# EAGLE board PCB (EAGLE 9.7.0)
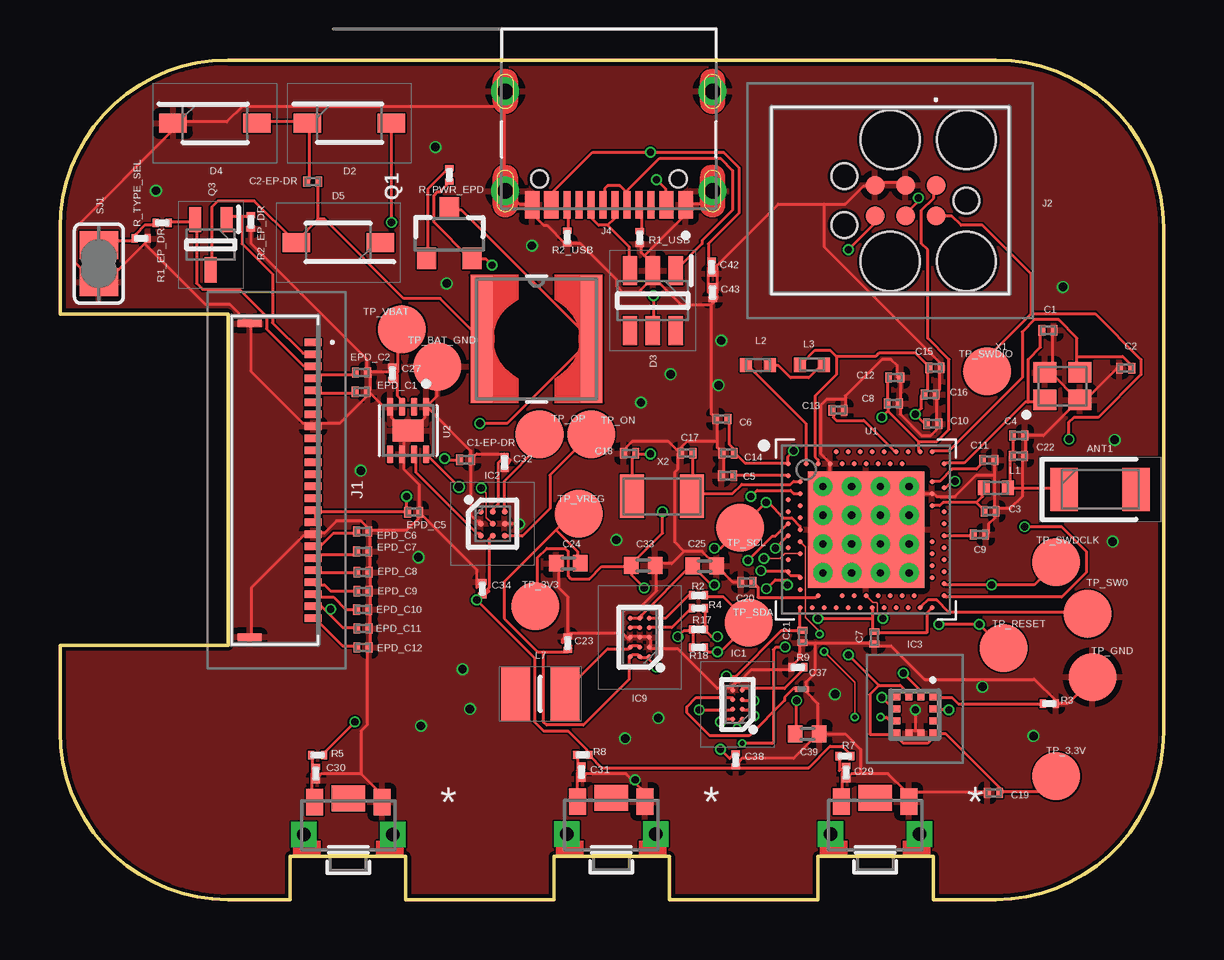
[diagram p0: board, top side]
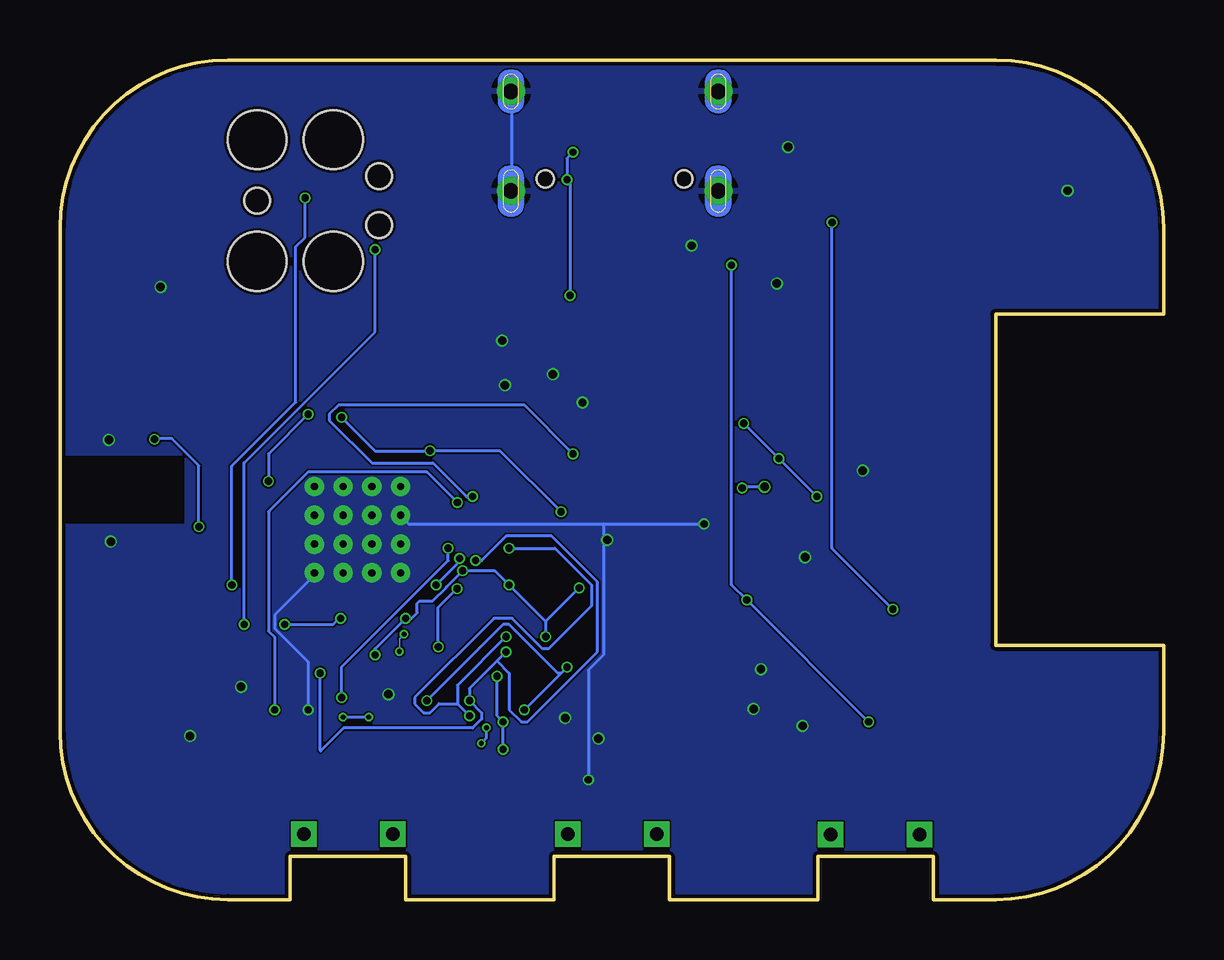
[diagram p1: board, bottom side, seen from below]

Size 46 x 35 mm. Coordinates in mm from the lower left corner, seen from the top.
Outline: 39,0 36.4,0 36.4,1.8 31.6,1.8 31.6,0 25.4,0 25.4,1.8 20.6,1.8 20.6,0 14.4,0 14.4,1.8 9.6,1.8 9.6,0 7,0 arc-90 0,7 0,10.6 7,10.6 7,24.4 0,24.4 0,28 arc-90 7,35 39,35 arc-90 46,28 46,7 arc-90 39,0
Copper layers (1*16): Top 0.035mm / dielectric 1.6mm / Bottom 0.035mm
Design rules "jlcpcb-2layers.dru": minimum track width 0.07mm, minimum drill 0.2mm, track to track 0.07mm, track to pad 0.07mm, pad to pad 0.07mm, via to via 0.07mm, smd to smd 0.07mm, copper to edge 0.15mm, drill to drill 0.1mm, minimum pad ring 10mil, minimum via ring 3mil, stop-mask expansion 4mil, vias tented up to drill 0mil, thermal gap 10mil
tRestrict: area 40.8,15.7 to 45.9,18.5
bRestrict: area 40.8,15.7 to 45.9,18.5

## Footprints (pad centres in the part's own frame; a part is rotated, then mirrored left to right if it is on the bottom)
2450AT18B100E_ANTC3216X140N = smd 1.15 x 1.8: 1 -1.5,0; 2 1.5,0
NORDIC_NRF_3_RESC0201_L = smd 0.28 x 0.43: 1 -0.255,0; 2 0.255,0
GRM011R60J152KE01L_1_0201 = smd 0.35 x 0.25: 1 0,0.275; 2 0,-0.275
PERFECT_0402_0402 = smd 0.6 x 0.7: 1 -0.5,0; 2 0.5,0
GRM011R60J152KE01L_2_CAPC0201X13N = smd 0.22 x 0.23: 1 -0.185,0; 2 0.185,0
ESP32_C6_LIBRARY_5_SOD3716X135N = smd 1.15 x 0.8: 1 -1.75,0; 2 1.75,0
ESP32_C6_LIBRARY_3_SOT95P280X145-6N = smd 1.2 x 0.6: 1 -1.25,0.95; 2 -1.25,0; 3 -1.25,-0.95; 4 1.25,-0.95; 5 1.25,0; 6 1.25,0.95
BQ25180YBGR_BGA8C40P2X4_100X155X50 = smd 0.2 x 0.2: A1 -0.2,0.6; A2 0.2,0.6; B1 -0.2,0.2; B2 0.2,0.2; C1 -0.2,-0.2; C2 0.2,-0.2; D1 -0.2,-0.6; D2 0.2,-0.6
DRV2605YZFR_BGA9C50P3X3_144X144X62 = smd 0.25 x 0.25: A1 -0.5,0.5; A2 0,0.5; A3 0.5,0.5; B1 -0.5,0; B2 0,0; B3 0.5,0; C1 -0.5,-0.5; C2 0,-0.5; C3 0.5,-0.5
BMA423_BMA423 = smd 0.3 x 0.35: 1 -0.75,-0.775; 2 -0.25,-0.775; 3 0.25,-0.775; 4 0.75,-0.775; 7 0.75,0.775; 8 0.25,0.775; 9 -0.25,0.775; 10 -0.75,0.775 | smd 0.35 x 0.3: 5 0.775,-0.25; 6 0.775,0.25; 11 -0.775,0.25; 12 -0.775,-0.25
RT6160AWSC_BGA15C40P3X5_140X230X60 = smd 0.216 x 0.216: A1 -0.4,0.8; A2 0,0.8; A3 0.4,0.8; B1 -0.4,0.4; B2 0,0.4; B3 0.4,0.4; C1 -0.4,0; C2 0,0; C3 0.4,0; D1 -0.4,-0.4; D2 0,-0.4; D3 0.4,-0.4; E1 -0.4,-0.8; E2 0,-0.8; E3 0.4,-0.8
503480-2400_5034802400 = smd 0.3 x 0.7: 1 -5.75,1.525; 2 -5.25,1.525; 3 -4.75,1.525; 4 -4.25,1.525; 5 -3.75,1.525; 6 -3.25,1.525; 7 -2.75,1.525; 8 -2.25,1.525; 9 -1.75,1.525; 10 -1.25,1.525; 11 -0.75,1.525; 12 -0.25,1.525; 13 0.25,1.525; 14 0.75,1.525; 15 1.25,1.525; 16 1.75,1.525; 17 2.25,1.525; 18 2.75,1.525; 19 3.25,1.525; 20 3.75,1.525; 21 4.25,1.525; 22 4.75,1.525; 23 5.25,1.525; 24 5.75,1.525 | smd 0.3 x 1: MP1 -6.54,-1.125; MP2 6.54,-1.125
TC2030-IDC_TC2030IDC = smd 0.783 x 0.783: 1 -0.953,-0.635; 2 -0.953,0.635; 3 0.317,-0.635; 4 0.317,0.635; 5 1.588,-0.635; 6 1.588,0.635 | hole 2.451: -2.223,-2.54; -2.223,2.54; 0.952,-2.54; 0.952,2.54 | hole 1.067: -2.223,0; 2.857,-1.016; 2.857,1.016
KH-TYPE-C-16P_KINGHELM_KH-TYPE-C-16P = smd 0.6 x 1.15: A1_B12 -3.2,4.725; A4_B9 -2.4,4.725; A9_B4 2.4,4.725; A12_B1 3.2,4.725 | smd 0.3 x 1.15: A5 -1.25,4.725; A6 -0.25,4.725; A7 0.25,4.725; A8 1.25,4.725; B5 1.75,4.725; B6 0.75,4.725; B7 -0.75,4.725; B8 -1.75,4.725 | drill 0.65 pad 1.05: SH1 -4.32,0; SH2 4.32,0; SH3 -4.32,4.15; SH4 4.32,4.15 | hole 0.7: -2.89,3.65; 2.89,3.65
NORDIC_NRF_2_RESC0402_L = smd 0.5 x 0.6: 1 -0.5,0; 2 0.5,0
ESP32_C6_LIBRARY_2_IND_4828-WE-TPC_WRE = smd 0.9 x 5.3: 1 -2.286,0; 2 2.286,0
MLP2016SR47MT0S1_INDC2016X100N = smd 1.2 x 2.2: 1 -1.028,0; 2 1.028,0
ESP32_C6_LIBRARY_4_ESP32_C6_LIBRARY_4_ESP32_C6_LIBRARY_4_ESP32_C6_LIBRARY_4_ESP32_WROVER_SPARKFUN-DISCRETESEMI_SOT23-3 = smd 0.8 x 0.9: 1 -0.95,-1; 2 0.95,-1; 3 0,1.1
ESP32_C6_LIBRARY_6_SOT65P210X110-3N = smd 1.05 x 0.5: 1 -1.05,0.65; 2 -1.05,-0.65; 3 1.05,0
CPF0201D7K68C1_0201 = smd 0.35 x 0.25: 1 0,0.275; 2 0,-0.275
ERA-1AEB3401C_0201 = smd 0.35 x 0.25: 1 0,0.275; 2 0,-0.275
ESP32_C6_LIBRARY_7_JUMPER_SJ = smd 1.168 x 1.6: 1 -0.762,0; 2 0.762,0
2025-10-22_07-23-44_LIBRARY_SW_EVP-AKE31A_PAN = smd 0.711 x 1.092: 1 -1.4,-0.972; 2 1.4,-0.972 | drill 0.559 pad 0.914 square: 3 -1.848,0.381; 4 1.848,0.381 | smd 1.397 x 1.092: 5 0,-1.124
HECTOR_WATCH_1_TP20R = smd 2 x 2: TP 0,0
NORDIC_NRF_4_AQFN50P700X700X85_HS-74N = smd 4.85 x 4.85: P$74 0,0 | drill 0.3 pad 0.6: P$75 -1.8,1.8; P$76 -0.6,1.8; P$77 0.6,1.8; P$78 1.8,1.8; P$79 -1.8,0.6; P$80 -0.6,0.6; P$81 0.6,0.6; P$82 1.8,0.6; P$83 -1.8,-0.6; P$84 -0.6,-0.6; P$85 0.6,-0.6; P$86 1.8,-0.6; P$87 -1.8,-1.8; P$88 -0.6,-1.8; P$89 0.6,-1.8; P$90 1.8,-1.8 | smd 0.2 x 0.2: P$A8 -1.25,3.25; P$A10 -0.75,3.25; P$A12 -0.25,3.25; P$A14 0.25,3.25; P$A16 0.75,3.25; P$A18 1.25,3.25; P$A20 1.75,3.25; P$A22 2.25,3.25; P$A23 2.75,3.25; P$AA24 3.25,-2.25; P$AB2 -2.75,-2.5; P$AC5 -2,-2.75; P$AC9 -1,-2.75; P$AC11 -0.5,-2.75; P$AC13 0,-2.75; P$AC15 0.5,-2.75; P$AC17 1,-2.75; P$AC19 1.5,-2.75; P$AC21 2,-2.75; P$AC24 3.25,-2.75; P$AD2 -2.75,-3.25; P$AD4 -2.25,-3.25; P$AD6 -1.75,-3.25; P$AD8 -1.25,-3.25; P$AD10 -0.75,-3.25; P$AD12 -0.25,-3.25; P$AD14 0.25,-3.25; P$AD16 0.75,-3.25; P$AD18 1.25,-3.25; P$AD20 1.75,-3.25; P$AD22 2.25,-3.25; P$AD23 2.75,-3.25; P$B1 -3.25,2.75; P$B3 -2.5,2.75; P$B5 -2,2.75; P$B7 -1.5,2.75; P$B9 -1,2.75; P$B11 -0.5,2.75; P$B13 0,2.75; P$B15 0.5,2.75; P$B17 1,2.75; P$B19 1.5,2.75; P$B24 3.25,2.75; P$C1 -3.25,2.25; P$D2 -2.75,2; P$D23 2.75,2; P$E24 3.25,1.75; P$F2 -2.75,1.5; P$F23 2.75,1.5; P$G1 -3.25,1.25; P$H2 -2.75,1; P$H23 2.75,1; P$J1 -3.25,0.75; P$J24 3.25,0.75; P$K2 -2.75,0.5; P$L1 -3.25,0.25; P$L24 3.25,0.25; P$M2 -2.75,0; P$N1 -3.25,-0.25; P$N24 3.25,-0.25; P$P2 -2.75,-0.5; P$P23 2.75,-0.5; P$R1 -3.25,-0.75; P$R24 3.25,-0.75; P$T2 -2.75,-1; P$T23 2.75,-1; P$U1 -3.25,-1.25; P$U24 3.25,-1.25; P$V23 2.75,-1.5; P$W1 -3.25,-1.75; P$W24 3.25,-1.75; P$Y2 -2.75,-2; P$Y23 2.75,-2
ESP32_C6_LIBRARY_SON50P200X200X80-9N = smd 0.76 x 0.27: 1 -0.985,0.75; 2 -0.985,0.25; 3 -0.985,-0.25; 4 -0.985,-0.75; 5 0.985,-0.75; 6 0.985,-0.25; 7 0.985,0.25; 8 0.985,0.75 | smd 0.9 x 1.3: 9 0,0
NORDIC_NRF_BT-XTAL_2016_N = smd 0.95 x 0.85: 1 -0.725,-0.575; 2 0.725,-0.575; 3 0.725,0.575; 4 -0.725,0.575
NORDIC_NRF_1_XTAL_3215_N = smd 1 x 1.8: 1 -1.25,0; 2 1.25,0

## Placement (x,y rotation side)
ANT1  2450AT18B100E  [2450AT18B100E_ANTC3216X140N]  43.36,17.1 0 top
C1  12pF  [NORDIC_NRF_3_RESC0201_L]  41.18,23.73 0 top
C1-EP-DR  10uF  [NORDIC_NRF_3_RESC0201_L]  16.91,18.33 0 top
C2  12pF  [NORDIC_NRF_3_RESC0201_L]  44.42,22.15 0 top
C2-EP-DR  4.7uF/25V  [NORDIC_NRF_3_RESC0201_L]  10.54,29.93 0 top
C3  1pF  [NORDIC_NRF_3_RESC0201_L]  38.77,16.19 0 top
C4  1pF  [NORDIC_NRF_3_RESC0201_L]  39.96,19.34 0 top
C5  100nF  [NORDIC_NRF_3_RESC0201_L]  27.83,17.67 180 top
C6  4.7µF  [NORDIC_NRF_3_RESC0201_L]  27.59,20.03 180 top
C7  100nF  [NORDIC_NRF_3_RESC0201_L]  33.95,10.91 270 top
C8  100nF  [NORDIC_NRF_3_RESC0201_L]  34.73,20.68 0 top
C9  820pF N.C.  [NORDIC_NRF_3_RESC0201_L]  38.33,15.22 0 top
C10  N.C.  [NORDIC_NRF_3_RESC0201_L]  36.38,19.83 0 top
C11  100pF  [NORDIC_NRF_3_RESC0201_L]  38.71,18.32 0 top
C12  100nF  [NORDIC_NRF_3_RESC0201_L]  34.8,21.76 0 top
C13  N.C.  [NORDIC_NRF_3_RESC0201_L]  32.43,20.4 0 top
C14  4.7µF  [NORDIC_NRF_3_RESC0201_L]  27.85,18.61 180 top
C15  1.0µF  [NORDIC_NRF_3_RESC0201_L]  36.47,22.17 0 top
C16  47nF  [NORDIC_NRF_3_RESC0201_L]  36.27,21.05 0 top
C17  12pF  [NORDIC_NRF_3_RESC0201_L]  26.13,18.61 0 top
C18  12pF  [NORDIC_NRF_3_RESC0201_L]  23.74,18.6 0 top
C19  100nF  [NORDIC_NRF_3_RESC0201_L]  38.91,4.45 180 top
C20  4.7µF  [NORDIC_NRF_3_RESC0201_L]  28.63,13.23 180 top
C21  4.7µF  [NORDIC_NRF_3_RESC0201_L]  30.95,10.96 270 top
C22  N.C.  [NORDIC_NRF_3_RESC0201_L]  39.95,18.49 0 top
C23  0.1uF  [GRM011R60J152KE01L_1_0201]  21.16,10.69 0 top
C24  10uF  [PERFECT_0402_0402]  21.18,14.02 0 top
C25  22uF  [PERFECT_0402_0402]  26.87,13.9 0 top
C27  0.1uF  [GRM011R60J152KE01L_1_0201]  13.86,21.94 0 top
C29  1uF  [GRM011R60J152KE01L_1_0201]  32.77,5.29 180 top
C30  1uF  [GRM011R60J152KE01L_1_0201]  10.67,5.25 180 top
C31  1uF  [GRM011R60J152KE01L_1_0201]  21.74,5.31 180 top
C32  1uF  [GRM011R60J152KE01L_1_0201]  18.53,18.22 180 top
C33  22uF  [PERFECT_0402_0402]  24.31,13.93 0 top
C34  0.1uF  [GRM011R60J152KE01L_1_0201]  17.61,12.96 0 top
C37  1uF  [GRM011R60J152KE01L_2_CAPC0201X13N]  30.92,8.78 180 top
C38  1uF  [GRM011R60J152KE01L_1_0201]  28.17,5.82 180 top
C39  10uF  [PERFECT_0402_0402]  31.15,6.91 0 top
C42  0.1uF  [GRM011R60J152KE01L_1_0201]  27.16,26.36 0 top
C43  4.7uF  [GRM011R60J152KE01L_1_0201]  27.2,25.3 0 top
D2  MBR0530  [ESP32_C6_LIBRARY_5_SOD3716X135N]  12.07,32.37 0 top
D3  USBLC6-2SC6Y  [ESP32_C6_LIBRARY_3_SOT95P280X145-6N]  24.71,24.97 270 top
D4  MBR0530  [ESP32_C6_LIBRARY_5_SOD3716X135N]  6.46,32.36 0 top
D5  MBR0530  [ESP32_C6_LIBRARY_5_SOD3716X135N]  11.6,27.39 180 top
EPD_C1  1uF/50V  [NORDIC_NRF_3_RESC0201_L]  12.56,21.16 180 top
EPD_C2  1uF/50V  [NORDIC_NRF_3_RESC0201_L]  12.57,21.97 180 top
EPD_C5  0.1uF/50V  [NORDIC_NRF_3_RESC0201_L]  14.74,16.15 180 top
EPD_C6  1uF/50V  [NORDIC_NRF_3_RESC0201_L]  12.62,15.34 180 top
EPD_C7  1uF/50V  [NORDIC_NRF_3_RESC0201_L]  12.62,14.51 180 top
EPD_C8  1uF/50V  [NORDIC_NRF_3_RESC0201_L]  12.63,13.64 180 top
EPD_C9  1uF/50V  [NORDIC_NRF_3_RESC0201_L]  12.63,12.85 180 top
EPD_C10  1uF/50V  [NORDIC_NRF_3_RESC0201_L]  12.62,12.09 180 top
EPD_C11  1uF/50V  [NORDIC_NRF_3_RESC0201_L]  12.63,11.3 180 top
EPD_C12  1uF/50V  [NORDIC_NRF_3_RESC0201_L]  12.63,10.51 180 top
IC1  BQ25180YBGR  [BQ25180YBGR_BGA8C40P2X4_100X155X50]  28.24,8.13 180 top
IC2  DRV2605YZFR  [DRV2605YZFR_BGA9C50P3X3_144X144X62]  18.03,15.67 0 top
IC3  BMA421  [BMA423_BMA423]  35.63,7.7 180 top
IC9  RT6160AWSC  [RT6160AWSC_BGA15C40P3X5_140X230X60]  24.17,10.93 180 top
J1  503480-2400  [503480-2400_5034802400]  9.03,17.48 270 top
J2  TC2030-IDC  [TC2030-IDC_TC2030IDC]  35.56,29.14 180 top
J4  KH-TYPE-C-16P  [KH-TYPE-C-16P_KINGHELM_KH-TYPE-C-16P]  22.88,33.69 180 top
L1  3.9nH  [NORDIC_NRF_2_RESC0402_L]  39.02,17.16 0 top
L2  10µH  [NORDIC_NRF_2_RESC0402_L]  29.1,22.28 0 top
L3  15nH  [NORDIC_NRF_2_RESC0402_L]  31.34,22.3 180 top
L5  68uH  [ESP32_C6_LIBRARY_2_IND_4828-WE-TPC_WRE]  19.86,23.37 0 top
L7  FTC252012SR47MBCA  [MLP2016SR47MT0S1_INDC2016X100N]  20.02,8.57 180 top
Q1  20V/4.2A/52mΩ/1.4W  [ESP32_C6_LIBRARY_4_ESP32_C6_LIBRARY_4_ESP32_C6_LIBRARY_4_ESP32_C6_LIBRARY_4_ESP32_WROVER_SPARKFUN-DISCRETESEMI_SOT23-3]  16.23,27.73 0 top
Q3  SI1308EDL-T1-GE3  [ESP32_C6_LIBRARY_6_SOT65P210X110-3N]  6.29,27.3 270 top
R1_EP_DR  0.47  [CPF0201D7K68C1_0201]  4.26,28.21 90 top
R1_USB  5K1  [ERA-1AEB3401C_0201]  24.17,27.6 180 top
R2  0  [CPF0201D7K68C1_0201]  26.62,12.68 90 top
R2_EP_DR  10K  [CPF0201D7K68C1_0201]  7.96,28.25 180 top
R2_USB  5K1  [ERA-1AEB3401C_0201]  21.15,27.62 0 top
R3  0  [CPF0201D7K68C1_0201]  41.24,8.16 90 top
R4  0  [CPF0201D7K68C1_0201]  26.61,12.15 90 top
R5  10K  [ERA-1AEB3401C_0201]  10.74,6.02 90 top
R7  10K  [ERA-1AEB3401C_0201]  32.72,5.98 90 top
R8  10K  [ERA-1AEB3401C_0201]  21.79,6.03 90 top
R9  10K  [CPF0201D7K68C1_0201]  30.76,9.68 90 top
R17  3K3  [CPF0201D7K68C1_0201]  26.62,11.26 90 top
R18  3K3  [CPF0201D7K68C1_0201]  26.62,10.51 90 top
R_PWR_EPD  10K  [CPF0201D7K68C1_0201]  16.23,30.21 0 top
R_TYPE_SEL  2.2  [CPF0201D7K68C1_0201]  3.38,27.56 270 top
SJ1  [ESP32_C6_LIBRARY_7_JUMPER_SJ]  1.62,26.51 90 top
SW_DN  2025-10-22_07-23-44_LIBRARY_EVP-AKE31ASW_EVP-AKE31A_PAN  [2025-10-22_07-23-44_LIBRARY_SW_EVP-AKE31A_PAN]  33.98,3.11 180 top
SW_ENT  2025-10-22_07-23-44_LIBRARY_EVP-AKE31ASW_EVP-AKE31A_PAN  [2025-10-22_07-23-44_LIBRARY_SW_EVP-AKE31A_PAN]  22.98,3.11 180 top
SW_UP  2025-10-22_07-23-44_LIBRARY_EVP-AKE31ASW_EVP-AKE31A_PAN  [2025-10-22_07-23-44_LIBRARY_SW_EVP-AKE31A_PAN]  12.02,3.09 180 top
TP_3.3V  HECTOR_WATCH_1_TPTP20R  [HECTOR_WATCH_1_TP20R]  41.53,5.14 0 top
TP_3V3  HECTOR_WATCH_1_TPTP20R  [HECTOR_WATCH_1_TP20R]  19.82,12.22 0 top
TP_BAT_GND  HECTOR_WATCH_1_TPTP20R  [HECTOR_WATCH_1_TP20R]  15.73,22.22 0 top
TP_GND  HECTOR_WATCH_1_TPTP20R  [HECTOR_WATCH_1_TP20R]  43.04,9.28 0 top
TP_ON  HECTOR_WATCH_1_TPTP20R  [HECTOR_WATCH_1_TP20R]  22.14,19.4 0 top
TP_OP  HECTOR_WATCH_1_TPTP20R  [HECTOR_WATCH_1_TP20R]  19.99,19.4 0 top
TP_RESET  HECTOR_WATCH_1_TPTP20R  [HECTOR_WATCH_1_TP20R]  39.33,10.49 0 top
TP_SCL  HECTOR_WATCH_1_TPTP20R  [HECTOR_WATCH_1_TP20R]  28.35,15.5 0 top
TP_SDA  HECTOR_WATCH_1_TPTP20R  [HECTOR_WATCH_1_TP20R]  28.7,11.53 0 top
TP_SW0  HECTOR_WATCH_1_TPTP20R  [HECTOR_WATCH_1_TP20R]  42.83,11.91 0 top
TP_SWDCLK  HECTOR_WATCH_1_TPTP20R  [HECTOR_WATCH_1_TP20R]  41.52,14.06 0 top
TP_SWDIO  HECTOR_WATCH_1_TPTP20R  [HECTOR_WATCH_1_TP20R]  38.64,22.02 0 top
TP_VBAT  HECTOR_WATCH_1_TPTP20R  [HECTOR_WATCH_1_TP20R]  14.25,23.78 0 top
TP_VREG  HECTOR_WATCH_1_TPTP20R  [HECTOR_WATCH_1_TP20R]  21.62,16.08 0 top
U1  NRF52840 _QF  [NORDIC_NRF_4_AQFN50P700X700X85_HS-74N]  33.6,15.42 0 top
U2  MAX17048G+T10  [ESP32_C6_LIBRARY_SON50P200X200X80-9N]  14.51,19.55 270 top
X1  32MHz  [NORDIC_NRF_BT-XTAL_2016_N]  41.78,21.4 0 top
X2  32.768kHz  [NORDIC_NRF_1_XTAL_3215_N]  25.09,16.81 0 top

## Library data of the parts
ANT1 = InkTime_v5; ARROW_PART_NUMBER: 2450AT18B100E; ARROW_PRICE-STOCK: https://www.arrow.com/en/products/2450at18b100e/johanson-dielectrics?utm_currency=USD&region=nac; DESCRIPTION: Antennas 2.45GHz ANTENNA; HEIGHT: 1.4mm; MANUFACTURER_NAME: JOHANSON TECHNOLOGY; MANUFACTURER_PART_NUMBER: 2450AT18B100E; MOUSER_PART_NUMBER: 609-2450AT18B100E; MOUSER_PRICE-STOCK: https://www.mouser.co.uk/ProductDetail/Johanson-Technology/2450AT18B100E?qs=yCnrNFeXz%252Bh5MFsFIXGZGA%3D%3D
C1 C1-EP-DR C2 C2-EP-DR C3-C25 C27 C29-C34 C38 C39 C42 C43 EPD_C1 EPD_C2 EPD_C5-EPD_C12 L1-L3 R1_EP_DR R1_USB R2 R2_EP_DR R2_USB R3-R5 R7-R9 R17 R18 R_PWR_EPD R_TYPE_SEL SJ1 TP_3.3V TP_3V3 TP_BAT_GND TP_GND TP_ON TP_OP TP_RESET TP_SCL TP_SDA TP_SW0 TP_SWDCLK TP_SWDIO TP_VBAT TP_VREG X1 X2 = InkTime_v5
C37 = InkTime-Stefan_Badea; AVAILABILITY: In Stock; CHECK_PRICES: https://www.snapeda.com/parts/GRM011R60J152KE01L/Murata/view-part/?ref=eda; DESCRIPTION: SMD Capacitor X5R(EIA) with Capacitance: 1500pF Tol. 10%. Rated Voltage: 6.3Vdc; MF: Murata; MP: GRM011R60J152KE01L; PACKAGE: 0201 Murata; PRICE: None; SNAPEDA_LINK: https://www.snapeda.com/parts/GRM011R60J152KE01L/Murata/view-part/?ref=snap
D2 D4 D5 = InkTime_v5; AVAILABILITY: In Stock; CHECK_PRICES: https://www.snapeda.com/parts/MBR0530/Onsemi/view-part/?ref=eda; DESCRIPTION: Diode Schottky 30 V 500mA Surface Mount SOD-123; MF: ON Semiconductor; MP: MBR0530; PACKAGE: SOD-123-2 ON Semiconductor; PRICE: None; PURCHASE-URL: https://www.snapeda.com/api/url_track_click_mouser/?unipart_id=179458&manufacturer=ON Semiconductor&part_name=MBR0530&search_term=None; SNAPEDA_LINK: https://www.snapeda.com/parts/MBR0530/Onsemi/view-part/?ref=snap
D3 = InkTime_v5; AVAILABILITY: In Stock; CHECK_PRICES: https://www.snapeda.com/parts/USBLC6-2SC6Y/STMicroelectronics/view-part/?ref=eda; DESCRIPTION: 17V Clamp 5A (8/20µs) Ipp Tvs Diode Surface Mount SOT-23-6; MF: STMicroelectronics; MP: USBLC6-2SC6Y; PACKAGE: SOT-23-6 STMicroelectronics; PRICE: None; SNAPEDA_LINK: https://www.snapeda.com/parts/USBLC6-2SC6Y/STMicroelectronics/view-part/?ref=snap
IC1 = InkTime_v5; ARROW_PART_NUMBER: BQ25180YBGR; ARROW_PRICE-STOCK: https://www.arrow.com/en/products/bq25180ybgr/texas-instruments?utm_currency=USD&region=nac; DESCRIPTION: Charger IC Lithium Ion/Polymer, Lithium Iron Phosphate 8-DSBGA (1.6x1.1); HEIGHT: 0.5mm; MANUFACTURER_NAME: Texas Instruments; MANUFACTURER_PART_NUMBER: BQ25180YBGR; MOUSER_PART_NUMBER: 595-BQ25180YBGR; MOUSER_PRICE-STOCK: https://www.mouser.co.uk/ProductDetail/Texas-Instruments/BQ25180YBGR?qs=doiCPypUmgEWjAK%252BJAX6Tw%3D%3D
IC2 = InkTime_v5; ARROW_PART_NUMBER: DRV2605YZFR; ARROW_PRICE-STOCK: https://www.arrow.com/en/products/drv2605yzfr/texas-instruments?region=nac; DESCRIPTION: Haptic Driver for ERM/LRA with Built-In Library and Smart Loop Architecture; HEIGHT: 0.625mm; MANUFACTURER_NAME: Texas Instruments; MANUFACTURER_PART_NUMBER: DRV2605YZFR
IC3 = InkTime_v5; ARROW_PART_NUMBER: BMA423; ARROW_PRICE-STOCK: https://www.arrow.com/en/products/bma423/bosch; DESCRIPTION: Accelerometers Triaxial low-g 12bit Acceleration Sensor; HEIGHT: 1mm; MANUFACTURER_NAME: BOSCH; MANUFACTURER_PART_NUMBER: BMA423; MOUSER_PART_NUMBER: 262-BMA423; MOUSER_PRICE-STOCK: https://www.mouser.co.uk/ProductDetail/Bosch-Sensortec/BMA423?qs=HXFqYaX1Q2xC%252BSgeGoX3mg%3D%3D
IC9 = InkTime_v5; DESCRIPTION: Buck-Boost Regulator Positive Output Step-Up/Step-Down I2C DC-DC Controller IC 15-WL-CSP (BSC) (1.4x2.3); HEIGHT: 0.6mm; MANUFACTURER_NAME: RICHTEK; MANUFACTURER_PART_NUMBER: RT6160AWSC; MOUSER_PART_NUMBER: 835-RT6160AWSC; MOUSER_PRICE-STOCK: https://www.mouser.co.uk/ProductDetail/Richtek/RT6160AWSC?qs=amGC7iS6iy%2FLd9PSoixZXQ%3D%3D
J1 = InkTime_v5; DESCRIPTION: FFC & FPC Connectors 0.5mm FPC RA SMT Dual Contact 24Ckt; HEIGHT: 1.87mm; MANUFACTURER_NAME: Molex; MANUFACTURER_PART_NUMBER: 503480-2400; MOUSER_PART_NUMBER: 538-503480-2400; MOUSER_PRICE-STOCK: https://www.mouser.co.uk/ProductDetail/Molex/503480-2400?qs=OAhjpuo3Vu7efIoxFh9AOw%3D%3D
J2 = InkTime_v5; DESCRIPTION: CABLE ADAPTER 6 POS; HEIGHT: 19mm; MANUFACTURER_NAME: Tag Connect; MANUFACTURER_PART_NUMBER: TC2030-IDC
J4 = InkTime_v5; AVAILABILITY: Not in stock; CHECK_PRICES: https://www.snapeda.com/parts/KH-TYPE-C-16P/Kinghelm/view-part/?ref=eda; MF: kinghelm; MP: KH-TYPE-C-16P; PACKAGE: None; PRICE: None; SNAPEDA_LINK: https://www.snapeda.com/parts/KH-TYPE-C-16P/Kinghelm/view-part/?ref=snap
L5 = InkTime_v5; COPYRIGHT: Copyright (C) 2024 Ultra Librarian. All rights reserved.; MANUFACTURER_PART_NUMBER: 744043680; MFR_NAME: Wurth Electronics
L7 = InkTime_v5; DESCRIPTION: SMD / SMT Inductors (Coils), L=0.47?H, L x W x T :; HEIGHT: 1mm; JLCPCB: https://jlcpcb.com/partdetail/6763488-FTC252012SR47MBCA/C5832368; MANUFACTURER_NAME: TDK; MANUFACTURER_PART_NUMBER: FTC252012SR47MBCA
Q1 = InkTime_v5; PROD_ID: TRAN-14388
Q3 = InkTime_v5; AVAILABILITY: In Stock; CHECK_PRICES: https://www.snapeda.com/parts/SI1308EDL-T1-GE3/Vishay+Siliconix/view-part/?ref=eda; DESCRIPTION: Si1308EDL-T1-GE3 N-channel MOSFET Transistor, 1.5 A, 30 V, 3-Pin SC-70 | Siliconix / Vishay SI1308EDL-T1-GE3; MF: Vishay Siliconix; MP: SI1308EDL-T1-GE3; PACKAGE: SOT-323 Vishay Semiconductor; PRICE: None; PURCHASE-URL: https://www.snapeda.com/api/url_track_click_mouser/?unipart_id=274603&manufacturer=Vishay Siliconix&part_name=SI1308EDL-T1-GE3&search_term=None; SNAPEDA_LINK: https://www.snapeda.com/parts/SI1308EDL-T1-GE3/Vishay+Siliconix/view-part/?ref=snap
SW_DN SW_ENT SW_UP = InkTime_v5; COPYRIGHT: Copyright (C) 2025 Ultra Librarian. All rights reserved.; DIGI-KEY_PART_NUMBER_1: P123437TR-ND; DIGI-KEY_PART_NUMBER_2: P123437CT-ND; DIGI-KEY_PART_NUMBER_3: P123437DKR-ND; MANUFACTURER_NAME: Panasonic; MANUFACTURER_PART_NUMBER: EVP-AKE31A
U1 = InkTime_v5; U1: NRF52840 _QF
U2 = InkTime_v5; AVAILABILITY: In Stock; CHECK_PRICES: https://www.snapeda.com/parts/MAX17048G+T10/Analog+Devices/view-part/?ref=eda; DESCRIPTION: 3µA 1-Cell/2-Cell Fuel Gauge with ModelGauge; MF: Analog Devices; MP: MAX17048G+T10; PACKAGE: TDFN-8 Maxim; PRICE: None; PURCHASE-URL: https://www.snapeda.com/api/url_track_click_mouser/?unipart_id=329239&manufacturer=Analog Devices&part_name=MAX17048G+T10&search_term=None; SNAPEDA_LINK: https://www.snapeda.com/parts/MAX17048G+T10/Analog+Devices/view-part/?ref=snap

## Nets
3V3/1.7D: C34.2 IC2.C2 Q1.2 R5.2 R7.2 R8.2 R_PWR_EPD.2
3V3/2.4A: C6.1 C7.1 C8.1 C12.1 C14.1 C19.1 C25.1 C33.1 IC3.3 IC3.7 IC3.10 IC9.E2 IC9.E3 J2.1 R17.1 R18.1 TP_3.3V.TP TP_3V3.TP U1.P$A22 U1.P$AD14 U1.P$AD23 U1.P$B1 U1.P$W1 U1.P$Y2
ALERT/1.6C: U2.5
ALERT/2.5C: U1.P$J24
D+/1.5D: D3.4
D+/2.7D: U1.P$AD6
D-/1.5D: D3.6
D-/2.7D: U1.P$AD4
DN: D3.1 J4.A7 J4.B7
DP: D3.3 J4.A6 J4.B6
EPD_3V3: C1-EP-DR.1 EPD_C5.2 J1.15 J1.16 L5.2 Q1.3
EPD_BUSY/1.5D: J1.9
EPD_BUSY/2.2D: U1.P$AD12
EPD_CS/1.4C: J1.12
EPD_CS/2.2D: U1.P$K2
EPD_DC/1.5D: J1.11
EPD_DC/2.2D: U1.P$AD10
EPD_RST/1.5D: J1.10
EPD_RST/2.2D: U1.P$AC11
GDR: J1.2 Q3.1 R2_EP_DR.2
GND: C1-EP-DR.2 C1.2 C2.1 C3.2 C4.2 C5.2 C6.2 C7.2 C8.2 C9.2 C10.2 C11.2 C12.2 C13.2 C14.2 C15.2 C16.2 C17.1 C18.1 C19.2 C20.2 C21.2 C22.2 C23.1 C24.1 C25.2 C27.1 C29.1 C30.1 C31.1 C32.1 C33.2 C34.1 C37.1 C38.1 C39.2 C42.2 C43.2 D3.2 D4.1 EPD_C1.1 EPD_C2.1 EPD_C5.1 EPD_C6.1 EPD_C7.1 EPD_C8.1 EPD_C9.1 EPD_C10.1 EPD_C11.1 EPD_C12.1 IC1.D2 IC2.B1 IC2.B3 IC3.8 IC3.9 IC9.B1 IC9.C1 IC9.C2 IC9.C3 J1.8 J1.17 J1.MP1 J1.MP2 J2.3 J2.5 J4.A1_B12 J4.A12_B1 J4.SH1 J4.SH2 J4.SH3 J4.SH4 R1_USB.1 R2_EP_DR.1 R2_USB.2 R3.2 R9.1 R_TYPE_SEL.1 SJ1.1 SW_DN.1 SW_ENT.1 SW_UP.1 TP_BAT_GND.TP TP_GND.TP U1.P$74 U1.P$75 U1.P$76 U1.P$77 U1.P$78 U1.P$79 U1.P$80 U1.P$81 U1.P$82 U1.P$83 U1.P$84 U1.P$85 U1.P$86 U1.P$87 U1.P$88 U1.P$89 U1.P$90 U1.P$B7 U1.P$F23 U2.1 U2.4 U2.6 U2.9 X1.2 X1.4
HAPTIC_EN/1.4C: IC2.A1
HAPTIC_EN/2.6A: U1.P$U1
IMU_INT1: IC3.5 U1.P$N1
IMU_INT2: IC3.6 U1.P$P2
LX1: IC9.B2 IC9.B3 L7.1
LX2: L7.2
MOSI/1.5B: J1.14
MOSI/2.2D: U1.P$B13
N$1: IC1.D1 R9.2
N$2: L2.1 U1.P$B3
N$3: IC3.1 R3.1
N$4: L2.2 L3.1
N$5: C10.1 C15.1 C16.1 L3.2 U1.P$B5 U1.P$E24
N$6: C13.1 U1.P$A18
N$7: C5.1 U1.P$C1
N$8: IC9.E1 R2.1
N$9: C17.2 U1.P$D2 X2.2
N$10: IC9.D2 IC9.D3
N$11: IC9.D1 R4.1
N$12: C18.2 U1.P$F2 X2.1
N$13: C20.1 U1.P$AC5
N$14: C9.1 U1.P$N24
N$15: C3.1 L1.1 U1.P$H23
N$16: ANT1.1 C4.1 C22.1 L1.2
N$17: C11.1 U1.P$D23
N$18: C1.1 U1.P$B24 X1.1
N$19: C2.2 U1.P$A23 X1.3
N$20: C2-EP-DR.1 D2.1 D4.2
N$21: C2-EP-DR.2 D5.2 L5.1 Q3.3
N$22: D5.1
N$24: R1_EP_DR.1 R_TYPE_SEL.2 SJ1.2
N$25: C32.2 IC2.A2
N$26: J4.A5 R1_USB.2
N$27: J4.B5 R2_USB.1
N$28: EPD_C2.2 J1.4
N$29: EPD_C1.2 J1.5
N$30: EPD_C6.2 J1.18
N$31: EPD_C7.2 J1.19
N$32: EPD_C8.2 J1.20
N$33: EPD_C10.2 J1.22
N$34: EPD_C12.2 J1.24
OUT+: IC2.A3 TP_OP.TP
OUT-: IC2.C3 TP_ON.TP
P0.04: U1.P$J1
P0.09: U1.P$L24
P0.13/1.5D: C30.2 R5.1 SW_UP.2
P0.13/2.6C: U1.P$AD8
P0.14/1.5D: C31.2 R8.1 SW_ENT.2
P0.14/2.7C: U1.P$AC9
P0.19: U1.P$AC15
P0.20: U1.P$AD16
P0.21: U1.P$AC17
P0.22: U1.P$AD18
P0.23: U1.P$AC19
P0.24: U1.P$AD20
P0.25: U1.P$AC21
P0.26: U1.P$G1
P0.27: U1.P$H2
P0.28: U1.P$B11
P0.29: U1.P$A10
P0.30: U1.P$B9
P0.31: U1.P$A8
P1.01/1.6C: Q1.1 R_PWR_EPD.1
P1.01/2.4B: U1.P$Y23
P1.02/1.6C: C29.2 R7.1 SW_DN.2
P1.02/2.8C: U1.P$W24
P1.03: U1.P$V23
P1.04: U1.P$U24
P1.05: U1.P$T23
P1.06: U1.P$R24
P1.07: U1.P$P23
P1.09: U1.P$R1
P1.10: U1.P$A20
P1.11: U1.P$B19
P1.12: U1.P$B17
P1.13: U1.P$A16
P1.14: U1.P$B15
P1.15: U1.P$A14
PMIC_INT: IC1.A1 U1.P$T2
PREVGH: EPD_C9.2 J1.21
PREVGL: D2.2 EPD_C11.2 J1.23
RESE: J1.3 Q3.2 R1_EP_DR.2
RESET: J2.6 TP_RESET.TP U1.P$AC13
SCK/1.5B: J1.13
SCK/2.2D: U1.P$A12
SCL/1.4C: IC2.C1 U2.7
SCL/2.4C: IC1.B1 IC3.12 R4.2 R17.2 TP_SCL.TP U1.P$M2
SDA/1.4C: IC2.B2 U2.8
SDA/2.4C: IC1.C1 IC3.2 R2.2 R18.2 TP_SDA.TP U1.P$L1
SWDCLK: J2.4 TP_SWDCLK.TP U1.P$AA24
SWDIO: J2.2 TP_SWDIO.TP U1.P$AC24
SWO: TP_SW0.TP U1.P$AD22
VBAT/1.2A: C27.2 TP_VBAT.TP U2.2 U2.3
VBAT/2.5C: C37.2 IC1.C2
VBUS/1.5D: C42.1 C43.1 D3.5 J4.A4_B9 J4.A9_B4
VBUS/2.6D: C21.1 C38.2 IC1.A2 U1.P$AD2
VREG: C23.2 C24.2 C39.1 IC1.B2 IC9.A1 IC9.A2 IC9.A3 TP_VREG.TP

## Tracks (layer width: path | path; a pad name or v marks a point on that pad's centre or on a via)
3V3/1.7D  (via drill 0.3)
  Top 0.127: R_PWR_EPD.2 16.23,29.88 15.85,29.5 15.72,29.5 15.59,29.38 15.59,28.23 17.12,26.71 Q1.2 17.24,26.71 17.75,26.71 v18.01,26.45 | IC2.C2 18.01,15.15 17.88,15.02 17.88,12.99 C34.2 17.88,12.87 17.5,12.48 v17.37,12.48 19.79,10.07 19.79,7.4 20.17,7.02 21.18,7.02 21.94,6.26 21.94,6.13 R8.2 22.07,6.01 22.58,5.5 31.21,5.5 32.1,6.39 32.61,6.39 32.99,6.01 R7.2 | v12.29,7.4 11.02,6.13 R5.2
  Bottom 0.127: v12.29,7.4 v17.37,12.48 18.01,13.12 v18.01,26.45
3V3/2.4A  (via drill 0.3)
  Top 0.127: 30.33,18.2 28.55,18.2 28.17,18.58 C14.1 28.17,18.71 27.91,18.96 27.91,19.98 C6.1 | 35.79,19.09 35.79,18.71 U1.P$A22 | 34.52,20.36 35.79,19.09 | 34.52,20.36 34.52,20.61 C8.1 34.52,20.74 34.52,21.71 C12.1 | 35.79,19.09 36.55,19.09 37.06,19.6 37.06,22.52 36.17,23.41 36.17,27.09 35.91,27.34 35.91,28.74 36.42,29.25 36.42,29.76 J2.1 | 30.33,18.2 30.33,18.45 v30.58,18.71 | 34.52,20.36 v34.26,20.1 | 30.33,18.2 U1.P$B1 | 34.14,8.93 35.03,8.93 35.28,8.67 35.28,8.55 IC3.3 | 34.14,8.93 33.76,8.55 33.76,6.89 33.75,6.89 34.77,6.89 34.77,6.9 IC3.7 34.9,6.9 34.9,6.77 35.15,6.52 36.17,6.52 36.3,6.64 36.3,6.9 IC3.10 36.42,6.9 36.93,6.9 39.34,4.48 | 39.34,4.48 40.87,4.48 41.5,5.12 TP_3.3V.TP | 39.34,4.48 39.22,4.48 C19.1 | C33.1 23.72,13.88 22.58,13.88 22.07,13.37 21.31,13.37 21.18,13.5 21.18,14.52 21.05,14.64 20.29,14.64 19.91,14.26 19.91,12.23 TP_3V3.TP | 33.88,11.72 33.88,11.21 C7.1 34,11.12 36.13,11.12 36.13,11.94 36.35,12.16 U1.P$AD23 | 33.88,11.72 33.88,12.1 U1.P$AD14 | R18.1 26.39,10.58 26.39,11.21 R17.1 26.26,11.21 26.01,11.21 v25.75,10.96 | 30.33,13.63 30.25,13.71 v29.22,13.71 | 30.33,13.63 30.45,13.5 30.83,13.5 U1.P$Y2 | IC9.E3 23.85,11.72 24.1,11.72 IC9.E2 24.23,11.72 24.23,11.85 26.26,13.88 C25.1 27.15,13.12 v27.28,13.12 | 30.33,13.63 U1.P$W1 | v31.6,11.72 33.88,11.72 | v24.36,12.99 23.85,13.5 23.85,13.88 C33.1 | v32.87,10.2 34.14,8.93 | v25.12,16.17 25.12,15.28 23.85,14.01 C33.1
  Bottom 0.127: v34.26,20.1 32.87,18.71 v30.58,18.71 27.66,18.71 v25.12,16.17 | 25.75,11.6 v25.75,10.96 | 25.75,11.6 v27.28,13.12 27.87,13.71 v29.22,13.71 29.89,13.03 29.89,13.02 30.47,12.44 31.02,12.44 31.11,12.35 31.11,11.95 31.34,11.72 v31.6,11.72 32.87,10.45 v32.87,10.2 | 25.75,11.6 v24.36,12.99
DN
  Top 0.127: 23.59,29.5 23.34,29.76 22.83,29.76 22.71,29.63 22.71,28.99 J4.A7 | 23.59,29.5 23.59,28.99 J4.B7 23.59,29.5 | 23.59,29.5 24.99,30.9 27.53,30.9 28.04,30.39 28.04,28.74 26.77,27.47 26.77,27.34 25.75,26.33 D3.1
DP
  Top 0.127: 22.83,28.1 22.45,28.1 22.2,28.36 22.2,28.87 J4.B6 | 22.83,28.1 23.09,28.36 23.09,28.87 J4.A6 | 22.83,28.1 23.72,27.22 23.72,26.33 D3.3
EPD_3V3  (via drill 0.3)
  Top 0.127: 10.64,16.17 14.45,16.17 | 14.45,16.17 v14.45,16.8 | 14.45,16.17 EPD_C5.2 | 10.64,16.17 10.64,15.79 J1.16 | 10.64,16.17 J1.15 | Q1.3 16.36,28.74 16.74,28.74 22.07,23.41 L5.2 22.07,23.28 18.64,19.85 v17.5,19.85 | v16.03,18.38 16.09,18.33 C1-EP-DR.1
  Bottom 0.127: v14.45,16.8 15.97,18.33 | v17.5,19.85 15.97,18.33 | 15.97,18.33 v16.03,18.38
GDR
  Top 0.127: 7.59,28.49 7.09,28.49 6.96,28.36 Q3.1 | 7.59,28.49 7.85,28.49 R2_EP_DR.2 | 7.59,28.49 7.59,27.34 8.86,26.07 8.86,24.04 10.13,22.77 10.51,22.77 J1.2
GND  (via drill 0.3, 0.35)
  Top 0.127: C34.1 17.37,12.99 17.37,13.75 15.09,16.04 EPD_C5.1 | 12.55,5.25 10.9,5.25 C30.1 | 12.55,5.25 13.31,4.48 13.31,4.1 SW_UP.1 | 12.93,15.4 12.55,15.79 11.53,15.79 11.02,15.28 10.64,15.28 J1.17 10.51,15.15 10.13,15.15 7.97,12.99 7.97,10.96 J1.MP2 | 12.55,5.25 12.55,7.02 12.8,7.28 12.8,10.45 EPD_C12.1 12.93,10.58 12.93,11.21 EPD_C11.1 12.93,11.34 12.93,11.98 EPD_C10.1 12.93,12.1 12.93,12.74 EPD_C9.1 12.93,12.87 12.93,13.63 EPD_C8.1 12.93,13.75 12.93,14.39 EPD_C7.1 12.93,14.52 12.93,15.28 EPD_C6.1 12.93,15.4 | 12.93,15.4 14.45,15.4 14.96,15.91 14.96,16.04 EPD_C5.1 | 3.53,27.34 2.01,25.82 1.62,25.82 SJ1.1 1.5,25.69 0.61,26.58 0.61,27.98 4.67,32.04 4.67,32.3 D4.1 4.8,32.42 6.96,32.42 7.59,33.06 18.51,33.06 | 3.53,27.34 3.66,27.47 R_TYPE_SEL.1 | C32.1 18.77,18.33 18.51,18.58 17.37,18.58 17.24,18.45 C1-EP-DR.2 | IC2.B1 17.5,15.79 17.37,15.79 17.12,16.04 17.12,18.33 C1-EP-DR.2 | U2.9 14.45,19.47 14.32,19.34 14.32,18.58 U2.6 14.32,18.45 14.32,17.95 14.96,17.31 14.96,16.17 EPD_C5.1 | U2.1 15.21,20.48 15.21,20.1 14.58,19.47 U2.9 | C1-EP-DR.2 17.12,18.45 17.12,18.71 15.34,20.48 U2.1 | TP_BAT_GND.TP 15.72,22.14 15.72,20.99 15.34,20.61 U2.1 | C27.1 13.69,22.01 12.93,22.01 EPD_C2.1 | R2_EP_DR.1 7.97,27.85 7.97,27.34 12.8,22.52 12.8,22.01 EPD_C2.1 | EPD_C2.1 12.93,21.88 12.93,21.25 EPD_C1.1 12.93,21.12 | 12.93,21.12 11.66,19.85 10.64,19.85 J1.8 10.51,19.85 10.13,19.85 7.97,22.01 7.97,23.91 J1.MP1 7.85,24.04 7.09,24.8 6.07,24.8 3.53,27.34 | 12.93,21.12 13.44,20.61 13.69,20.61 U2.4 13.82,20.48 13.82,20.1 14.07,19.85 14.2,19.85 14.45,19.6 U2.9 | 23.98,4.86 24.36,4.48 24.36,4.1 SW_ENT.1
  Top 0.127: 23.98,4.86 23.59,5.25 21.94,5.25 C31.1 | v19.15,15.66 18.64,15.66 IC2.B3 | v23.98,4.99 23.98,4.86 | C9.2 38.71,15.28 38.71,15.66 38.96,15.91 38.96,16.17 C3.2 | 38.96,17.69 38.96,16.29 C3.2 | 38.96,17.69 38.96,18.2 C11.2 | C1.2 41.38,23.66 41.38,22.26 41.12,22.01 X1.4 41.12,21.88 41.38,21.88 42.39,20.87 X1.2 | C2.1 44.04,22.14 42.77,20.87 42.52,20.87 X1.2 | X1.2 42.39,20.74 40.99,19.34 40.23,19.34 C4.2 40.23,19.22 40.23,18.58 C22.2 40.11,18.45 40.11,16.8 39.6,16.29 39.09,16.29 C3.2 | 35.66,7.02 35.79,7.02 IC3.9 | 35.66,7.02 35.41,7.02 IC3.8 | v35.66,7.91 35.66,7.02 | 32.74,20.87 32.74,20.99 34.26,22.52 34.64,22.52 34.9,22.26 34.9,21.78 C12.2 35.03,21.7 35.03,20.74 C8.2 35.03,20.61 35.03,20.23 35.91,19.34 36.3,19.34 36.55,19.6 36.55,19.72 C10.2 36.55,19.85 36.55,20.99 C16.2 36.55,21.12 36.68,21.25 36.68,22.14 C15.2 36.68,22.26 36.68,22.39 31.85,27.22 31.85,28.99 | 32.74,20.87 32.74,20.48 C13.2 | 31.85,17.31 32.1,17.56 32.1,18.07 U1.P$B7 32.1,18.2 31.72,18.58 31.72,20.61 31.98,20.87 32.74,20.87 | 35.41,17.18 35.66,16.93 36.3,16.93 U1.P$F23 36.42,16.93 36.55,16.8 37.31,16.8 38.2,17.69 38.96,17.69 | 31.85,14.77 31.85,13.63 U1.P$87 | 31.85,14.77 U1.P$83 | 31.85,14.77 U1.P$74 | 31.85,17.31 U1.P$75 | 31.85,17.31 U1.P$74 | 34.14,13.63 33.12,13.63 U1.P$88 | U1.P$84 32.99,14.9 32.99,15.15 U1.P$74 | U1.P$80 32.99,16.04 U1.P$74 | 34.14,13.63 U1.P$89 34.26,13.63 35.28,13.63 U1.P$90 | 34.14,13.63 U1.P$74 | U1.P$85 34.14,14.77 33.88,14.52 U1.P$74 | 35.41,15.91 35.41,14.9 U1.P$86 | U1.P$81 34.26,16.04 U1.P$74 | 35.41,15.91 U1.P$82 | 35.41,15.91 U1.P$74 | 32.48,16.67 32.99,17.18 U1.P$76
  Top 0.127: U1.P$77 34.26,17.18 34.77,16.67 34.9,16.67 U1.P$74 | 35.41,17.18 U1.P$78 | 35.41,17.18 U1.P$74 | 32.48,16.67 31.85,16.04 U1.P$79 | 32.48,16.67 U1.P$74 | 18.51,33.06 18.51,33.57 J4.SH2 | 18.51,33.06 18.51,29.63 J4.SH4 18.64,29.5 19.15,28.99 19.66,28.99 J4.A12_B1 19.79,28.87 19.79,28.49 20.17,28.1 20.29,28.1 21.05,27.34 R2_USB.2 21.18,27.34 21.69,27.34 23.21,25.82 23.21,25.56 23.47,25.31 24.1,25.31 24.74,25.95 | J4.SH3 27.15,29.5 26.64,28.99 26.13,28.99 J4.A1_B12 26.01,28.87 26.01,28.49 24.36,26.84 | J2.3 35.15,29.88 34.01,29.88 J2.5 33.88,29.76 33.5,29.76 32.74,28.99 31.85,28.99 | 24.36,26.84 24.61,26.58 24.61,26.33 D3.2 | 24.36,26.84 24.23,26.96 24.23,27.22 R1_USB.1 | 27.15,24.8 27.4,25.06 27.4,25.18 C43.2 27.4,25.31 27.4,26.33 C42.2 27.4,26.45 29.94,28.99 31.85,28.99 | 27.15,24.8 25.88,24.8 24.74,25.95 | 24.74,25.95 24.74,26.2 D3.2 | 24.74,25.95 D3.2 | C18.1 23.59,18.71 23.59,18.83 23.85,19.09 25.37,19.09 25.75,18.71 C17.1 | C5.2 27.66,17.69 27.66,18.58 C14.2 27.53,18.71 27.4,18.83 27.4,19.09 | 27.4,19.09 27.4,19.98 C6.2 27.28,20.1 27.15,20.23 27.15,24.8 | 27.4,19.09 26.13,19.09 25.88,18.83 25.88,18.71 C17.1 | C20.2 28.29,13.25 28.04,13.25 27.4,13.88 C25.2 27.28,14.01 26.77,14.52 26.01,14.52 | 26.01,14.52 25.5,14.01 24.86,14.01 C33.2 24.86,13.88 24.86,12.87 24.1,12.1 23.59,12.1 23.47,11.98 23.47,11.09 | 21.18,11.09 20.93,10.83 20.93,10.71 C23.1 | 23.47,11.09 21.18,11.09 | 23.47,11.09 23.72,10.83 IC9.C3 23.85,10.96 24.1,10.96 IC9.C2 24.23,10.96 24.48,10.96 IC9.C1 24.61,10.83 24.61,10.58 IC9.B1 24.61,10.45 25.75,10.45 27.4,8.8 28.04,8.8 | 21.18,11.09 21.18,12.61 20.8,12.99 20.8,14.01 C24.1
  Top 0.127: 26.01,14.52 25.63,14.9 25.63,17.82 25.75,17.95 25.75,18.58 C17.1 | 33.37,5.25 34.52,5.25 35.28,4.48 | 33.37,5.25 32.99,5.25 C29.1 | 35.28,4.48 35.28,4.1 SW_DN.1 35.28,4.48 | 35.28,4.48 38.58,4.48 C19.2 | C38.1 28.42,5.88 30.58,5.88 31.6,6.9 C39.2 | C39.2 31.6,7.02 31.6,8.17 31.09,8.67 C37.1 31.09,8.8 31.09,9.05 31.47,9.44 31.47,10.71 | TP_GND.TP 43.03,9.18 42.01,8.17 41.63,8.17 R3.2 41.5,8.29 40.61,9.18 36.04,9.18 34.64,10.58 34.01,10.58 C7.2 33.88,10.71 31.47,10.71 | 28.04,8.8 28.04,8.93 28.17,9.05 28.29,9.05 28.8,9.56 30.45,9.56 R9.1 30.45,9.69 30.83,10.07 30.83,10.58 C21.2 30.96,10.71 31.47,10.71 | 33.37,5.25 33.37,6.26 32.74,6.9 31.72,6.9 C39.2 | 28.04,8.8 IC1.D2
  Bottom 0.127: 23.34,15.66 31.47,15.66 31.72,15.91 U1.P$79 | 23.34,15.66 v19.15,15.66 | v23.98,4.99 23.98,9.56 23.34,10.2 23.34,15.66 | U1.P$90 35.41,13.5 37.05,11.85 37.05,11.29 35.66,9.9 v35.66,7.91 | J4.SH1 27.15,33.57 27.15,29.63 J4.SH3
  other vias: 43.88,14.92 43.96,19.16 27.45,21.44 24.94,7.57 38.45,8.87 14.94,14.27 15.65,31.37 15.05,7.24 4,29.55 32.31,8.56 41.81,25.54 27.57,23.3 24.22,20.72 23.56,6.71 23.19,14.99 16.78,9.6 40.58,6.82 17.09,7.94 16.12,25.68 19.67,27.26 25.45,21.9 12.54,17.88
  pour Top: 292 corners
  pour Bottom: 252 corners
IMU_INT1  (via drill 0.3)
  Top 0.127: v29.82,14.64 30.33,15.15 U1.P$N1 | v34.26,8.42 34.77,7.91 IC3.5
  Bottom 0.127: v29.82,14.64 29.82,14.13 34.26,9.69 v34.26,8.42
IMU_INT2  (via drill 0.2)
  Top 0.07: U1.P$P2 31.07,14.7 31.07,11.77 31.66,11.18 v31.66,11.06 | v31.85,10.34 33.13,9.06 v33.13,7.6
  Top 0.127: IC3.6 34.6,7.45 34.45,7.6 v34.2,7.6
  Bottom 0.07: v31.66,11.06 31.85,10.87 v31.85,10.34
  Bottom 0.127: v33.13,7.6 v34.2,7.6
LX1
  Top 0.127: IC9.B2 24.1,10.58 23.85,10.58 IC9.B3 23.72,10.45 22.83,10.45 21.05,8.67 L7.1
N$1
  Top 0.127: IC1.D1 28.42,8.8 30.2,8.8 30.96,9.56 R9.2
N$2
  Top 0.127: U1.P$B3 31.09,18.2 31.09,19.85 28.67,22.26 L2.1
N$3
  Top 0.127: R3.1 40.87,8.17 37.44,8.17 37.18,8.42 36.42,8.42 IC3.1
N$4
  Top 0.127: L2.2 29.69,22.26 29.94,22.26 30.45,21.76 31.21,21.76 31.72,22.26 L3.1
N$5  (via drill 0.3)
  Top 0.127: 32.36,22.64 32.36,21.88 31.47,20.99 31.47,18.45 31.6,18.33 31.6,18.2 U1.P$B5 | 32.36,22.64 32.1,22.9 31.47,22.9 30.96,22.39 L3.2 | v37.31,17.44 37.18,17.44 36.93,17.18 U1.P$E24 | C10.1 36.04,19.85 v35.66,20.23 35.91,20.48 35.91,20.99 C16.1 36.04,21.12 36.17,21.25 36.17,22.14 C15.1 36.17,22.26 35.66,22.77 34.14,22.77 34.01,22.64 32.36,22.64
  Bottom 0.127: v37.31,17.44 37.31,18.58 v35.66,20.23
N$6
  Top 0.127: U1.P$A18 34.77,18.71 33.5,19.98 32.36,19.98 32.23,20.1 32.23,20.36 C13.1
N$7
  Top 0.127: U1.P$C1 30.33,17.69 28.17,17.69 C5.1
N$8
  Top 0.127: IC9.E1 24.61,11.72 25.25,11.72 26.26,12.74 R2.1
N$9
  Top 0.127: 26.39,16.93 28.04,16.93 28.42,17.31 30.45,17.31 30.58,17.44 30.83,17.44 U1.P$D2 | 26.39,16.93 26.39,18.58 C17.2 | 26.39,16.93 X2.2
N$10
  Top 0.127: IC9.D3 23.85,11.34 24.1,11.34 IC9.D2
N$11
  Top 0.127: IC9.D1 24.61,11.34 25.5,11.34 26.26,12.1 R4.1
N$12  (via drill 0.3)
  Top 0.127: v28.8,16.8 29.06,17.06 30.45,17.06 30.58,16.93 30.83,16.93 U1.P$F2 | v24.61,18.58 24.1,18.58 C18.2 23.98,18.58 23.85,18.45 23.85,16.93 X2.1
  Bottom 0.127: v28.8,16.8 29.06,16.8 30.45,18.2 32.99,18.2 34.77,19.98 34.77,20.23 34.39,20.61 26.64,20.61 v24.61,18.58
N$13
  Top 0.127: 28.93,13.12 C20.1 29.09,13.03 29.09,12.6 31.53,12.6 U1.P$AC5
N$14
  Top 0.127: U1.P$N24 36.93,15.15 38.07,15.15 C9.1
N$15
  Top 0.127: 38.2,16.55 36.8,16.55 36.68,16.42 36.42,16.42 U1.P$H23 | 38.2,16.55 38.45,16.29 C3.1 | 38.2,16.55 38.45,16.8 38.45,17.06 L1.1
N$16
  Top 0.127: C4.1 39.72,19.22 39.72,18.58 C22.1 39.6,18.45 39.6,17.18 L1.2 41.8,17.16 ANT1.1
N$17
  Top 0.127: U1.P$D23 36.42,17.44 36.68,17.44 37.18,17.95 38.2,17.95 38.45,18.2 C11.1
N$18
  Top 0.127: 40.36,20.74 40.99,20.74 X1.1 | 40.36,20.74 40.23,20.74 37.69,18.2 36.93,18.2 U1.P$B24 | 40.36,20.74 40.36,22.52 40.87,23.02 40.87,23.66 C1.1
N$19
  Top 0.127: 42.39,22.64 42.39,22.01 X1.3 | 42.39,22.64 42.39,23.41 41.63,24.17 40.61,24.17 40.11,23.66 40.11,21.76 37.06,18.71 36.42,18.71 U1.P$A23 | 42.39,22.64 44.3,22.64 44.55,22.39 44.55,22.26 C2.2
N$20
  Top 0.127: C2-EP-DR.1 10.39,30.01 10.39,32.3 D2.1 10.26,32.42 8.23,32.42 D4.2
N$21
  Top 0.127: 10.77,28.36 10.77,29.88 C2-EP-DR.2 | 10.77,28.36 9.88,27.47 D5.2 9.75,27.47 8.1,29.12 6.58,29.12 6.32,28.87 6.32,26.33 Q3.3 | 10.77,28.36 11.02,28.36 14.32,25.06 15.85,25.06 17.5,23.41 L5.1
N$24
  Top 0.127: R1_EP_DR.1 3.91,28.1 3.53,28.1 3.15,27.72 3.15,27.6 R_TYPE_SEL.2 3.02,27.47 1.75,27.47 1.62,27.34 SJ1.2
N$25
  Top 0.127: C32.2 18.26,18.2 18.26,16.48 18.03,16.26 IC2.A2
N$26
  Top 0.127: R1_USB.2 24.23,27.98 24.23,28.87 J4.A5
N$27
  Top 0.127: R2_USB.1 21.18,27.98 21.18,28.87 J4.B5
N$28
  Top 0.127: EPD_C2.2 12.29,21.88 10.77,21.88 10.64,21.76 J1.4
N$29
  Top 0.127: EPD_C1.2 12.29,21.12 10.64,21.12 J1.5
N$30
  Top 0.127: EPD_C6.2 12.29,15.28 11.4,15.28 10.9,14.77 10.64,14.77 J1.18
N$31
  Top 0.127: EPD_C7.2 12.29,14.39 10.77,14.39 10.64,14.26 J1.19
N$32
  Top 0.127: EPD_C8.2 12.29,13.63 10.64,13.63 J1.20
N$33
  Top 0.127: EPD_C10.2 12.29,12.1 11.91,12.1 11.4,12.61 10.64,12.61 J1.22
N$34
  Top 0.127: EPD_C12.2 12.29,10.58 11.78,10.58 10.64,11.72 J1.24
OUT+
  Top 0.127: IC2.A3 18.51,16.29 18.51,17.44 19.91,18.83 19.91,19.34 TP_OP.TP
OUT-
  Top 0.127: IC2.C3 18.64,15.15 19.28,15.15 20.42,16.29 20.42,17.69 22.07,19.34 TP_ON.TP
P0.13/1.5D
  Top 0.127: 10.51,5.25 10.51,6.01 R5.1 | 10.51,5.25 10.51,4.1 SW_UP.2 | 10.51,5.25 C30.2
P0.14/1.5D
  Top 0.127: R8.1 21.56,6.01 21.56,5.37 C31.2 21.56,5.25 21.56,4.1 SW_ENT.2
P1.01/1.6C
  Top 0.127: R_PWR_EPD.1 16.23,30.39 16.1,30.39 15.34,29.63 15.34,26.84 Q1.1
P1.02/1.6C
  Top 0.127: R7.1 32.48,5.88 32.48,5.37 C29.2 32.61,5.25 32.61,4.1 SW_DN.2
PMIC_INT  (via drill 0.2, 0.3)
  Top 0.07: v29.34,14.22 30.02,14.22 30.22,14.42 U1.P$T2
  Top 0.127: v30.23,10.53 29.85,10.53 29.73,10.41 29.73,6.55 29.69,6.51 v28.44,6.51 | v29.45,12.96 29.82,13.33 30.32,13.33 v30.32,13.12 | v28.22,7.16 28.22,7.31 IC1.A1
  Bottom 0.127: v30.23,10.53 30.23,12.18 v29.45,12.96 | v30.32,13.12 29.34,14.1 v29.34,14.22 | v28.44,6.51 28.22,6.73 v28.22,7.16
PREVGH
  Top 0.127: EPD_C9.2 12.29,12.87 11.28,12.87 11.02,13.12 10.64,13.12 J1.21
PREVGL  (via drill 0.3)
  Top 0.127: 11.15,11.98 10.9,12.23 J1.23 | 11.15,11.98 11.78,11.34 12.29,11.34 EPD_C11.2 | v13.82,28.23 13.82,32.3 D2.2 | 11.15,11.98 v11.28,12.1
  Bottom 0.127: v13.82,28.23 13.82,14.64 v11.28,12.1
RESE
  Top 0.127: R1_EP_DR.2 4.54,28.23 5.56,28.23 Q3.2 5.69,28.23 5.69,25.69 5.94,25.44 7.47,25.44 8.61,24.3 8.61,23.79 10.13,22.26 10.51,22.26 J1.3
RESET  (via drill 0.3)
  Top 0.07: U1.P$AC13 33.89,12.38 34.04,12.38 34.08,12.34 34.08,11.94 v34.3,11.72
  Top 0.127: v32.87,27.09 33.88,28.1 33.88,28.49 J2.6 | TP_RESET.TP 39.22,10.58 v38.33,11.47 v36.64,11.47 v36.64,11.46
  Bottom 0.127: v32.87,27.09 32.87,23.66 38.33,18.2 v38.33,11.47 | v36.64,11.46 34.62,11.46 34.37,11.72 v34.3,11.72
SCL/1.4C
  Top 0.127: IC2.C1 17.5,15.28 17.37,15.28 14.83,17.82 14.83,18.45 U2.7
SCL/2.4C  (via drill 0.3)
  Top 0.127: v28.93,7.66 28.67,7.91 28.42,7.91 IC1.B1 | v27.4,10.96 27.15,10.96 26.9,11.21 R17.2 26.9,11.34 26.9,12.1 R4.2 | v37.06,7.91 36.42,7.91 IC3.12 | v27.28,14.64 27.53,14.64 28.29,15.4 TP_SCL.TP 28.42,15.53 v29.44,16.55 29.52,16.55 30.16,15.91 30.5,15.91 30.85,15.56 U1.P$M2
  Bottom 0.127: 29.44,8.17 v28.93,7.66 | 29.44,8.17 29.44,8.93 v27.4,10.96 | v29.44,16.55 30.71,17.82 35.66,17.82 37.31,16.17 37.31,11.19 37.06,10.94 v37.06,7.91 | 29.44,8.17 30.2,8.17 30.58,7.79 30.83,7.79 31.21,8.17 31.21,8.42 27.91,11.72 27.15,11.72 25.88,10.45 25.63,10.45 23.85,12.23 23.85,13.12 25.37,14.64 v27.28,14.64
SDA/1.4C  (via drill 0.3, 0.35)
  Top 0.07: v17.56,17.16 17.77,16.95 17.77,15.93 IC2.B2
  Top 0.127: U2.8 v16.63,17.2
  Bottom 0.127: v16.63,17.2 17.51,17.2 v17.55,17.16 v17.56,17.16
SDA/2.4C  (via drill 0.3)
  Top 0.127: R2.2 26.9,12.61 27.66,12.61 28.6,11.67 TP_SDA.TP 28.66,11.46 27.53,10.33 v27.4,10.33 27.02,10.33 26.9,10.45 R18.2 | v28.93,8.29 28.42,8.29 IC1.C1 | v28.67,14.13 29.69,15.15 29.82,15.15 30.33,15.66 U1.P$L1 | v35.15,9.44 35.79,8.8 35.79,8.55 IC3.2
  Bottom 0.127: v27.4,10.33 27.79,9.94 | 27.79,9.94 28.93,8.8 v28.93,8.29 28.42,7.79 28.42,7.53 28.8,7.15 34.17,7.15 35.13,6.19 35.15,6.21 v35.15,9.44 | v28.67,14.13 28.42,14.13 27.4,15.15 25.5,15.15 23.59,13.25 23.59,10.33 26.52,7.4 26.77,7.4 27.28,7.91 27.28,9.44 27.79,9.94
SWDCLK  (via drill 0.3)
  Top 0.127: U1.P$AA24 36.93,13.12 v38.84,13.12 40.61,13.12 41.5,14.01 TP_SWDCLK.TP | v35.79,29.25 35.79,29.12 35.28,28.61 J2.4
  Bottom 0.127: v35.79,29.25 35.79,27.6 36.17,27.22 36.17,20.74 38.84,18.07 v38.84,13.12
SWDIO  (via drill 0.3)
  Top 0.127: 40.49,24.42 43.15,24.42 45.06,22.52 45.06,21.88 43.28,20.1 42.26,20.1 42.06,19.9 v42.06,19.19 | 40.49,24.42 38.71,22.64 38.71,22.14 TP_SWDIO.TP | U1.P$AC24 36.93,12.61 41.76,12.61 42.77,13.63 42.77,14.52 41.76,15.53 v40.22,15.53 v40.21,15.54 | 40.49,24.42 40.49,26.07 38.45,28.1 37.57,28.1 37.18,28.49 36.55,28.49 J2.2
  Bottom 0.127: v40.21,15.54 40.21,18.09 41.34,19.22 42.03,19.22 v42.06,19.19
SWO
  Top 0.127: U1.P$AD22 35.91,12.23 36.17,12.48 36.55,12.48 37.06,11.98 42.77,11.98 TP_SW0.TP
VBAT/1.2A
  Top 0.127: U2.2 14.71,20.61 14.32,20.61 U2.3 14.2,20.61 14.2,20.87 14.07,20.99 14.07,21.88 C27.2 14.07,22.01 14.07,23.53 14.2,23.66 TP_VBAT.TP
VBAT/2.5C
  Top 0.127: IC1.C2 28.04,8.42 26.52,8.42 26.13,8.04 26.13,7.79 27.09,6.83 28.74,6.83 30.2,8.29 30.2,8.42 30.58,8.8 30.71,8.8 C37.2
VBUS/1.5D  (via drill 0.3)
  Top 0.127: C43.1 27.02,25.31 27.02,26.33 C42.1 27.02,26.45 27.02,27.34 28.29,28.61 28.29,30.52 27.66,31.15 v24.61,31.15 22.2,31.15 20.55,29.5 20.55,28.99 J4.A9_B4 | v24.86,30.01 25.25,29.63 25.25,28.99 J4.A4_B9 | v24.74,25.18 24.74,23.79 D3.5
  Bottom 0.127: v24.61,31.15 24.86,30.9 v24.86,30.01 24.74,29.88 v24.74,25.18
VBUS/2.6D  (via drill 0.3)
  Top 0.127: U1.P$AD2 30.83,12.1 30.83,11.34 C21.1 30.83,11.21 30.07,11.21 28.17,9.31 v27.79,9.31 | v27.53,7.4 27.66,7.53 IC1.A2 | v27.53,6.26 27.91,5.88 C38.2
  Bottom 0.127: v27.53,6.26 v27.53,7.4 27.79,7.66 v27.79,9.31
VREG  (via drill 0.3)
  Top 0.127: 20.17,10.33 19.91,10.33 18.51,11.72 18.51,13.25 20.67,15.4 | 20.17,10.33 21.18,10.33 21.31,10.45 21.31,10.58 C23.2 | 20.67,15.4 21.31,16.04 21.56,16.04 TP_VREG.TP | 20.67,15.4 21.56,14.52 21.56,14.13 C24.2 | v26.64,7.91 28.04,7.91 IC1.B2 | 24.48,10.07 v24.86,9.69 | 24.48,10.07 24.23,10.07 IC9.A2 24.1,10.2 23.85,10.2 IC9.A3 23.72,10.07 23.72,9.18 21.82,7.28 20.29,7.28 20.17,7.4 20.17,10.33 | 24.48,10.07 IC9.A1 | v30.71,8.29 30.71,7.02 C39.1
  Bottom 0.127: v24.86,9.69 25.12,9.44 | 25.12,9.44 v26.64,7.91 | v30.71,8.29 27.53,11.47 27.28,11.47 25.25,9.44 25.12,9.44

## Text on the board
tNames: R_PWR_EPD | R_TYPE_SEL | R2_EP_DR | R2_USB | R1_USB | R1_EP_DR | C42 | C43 | C27 | C32 | C34 | R2 | R17 | R4 | C23 | R18 | R9 | R3 | R5 | R8 | C38 | R7 | C30 | C31 | C29